# Altium PCB Tran_RF1.PcbDoc
Units mm, origin at the board's own origin, x right, y up, seen from the top; angles counter-clockwise.
Board outline 127 x 101.6 mm, 2 copper layers (Top Layer, Bottom Layer); 61 components, 22 nets, 261 pads, 14 vias.
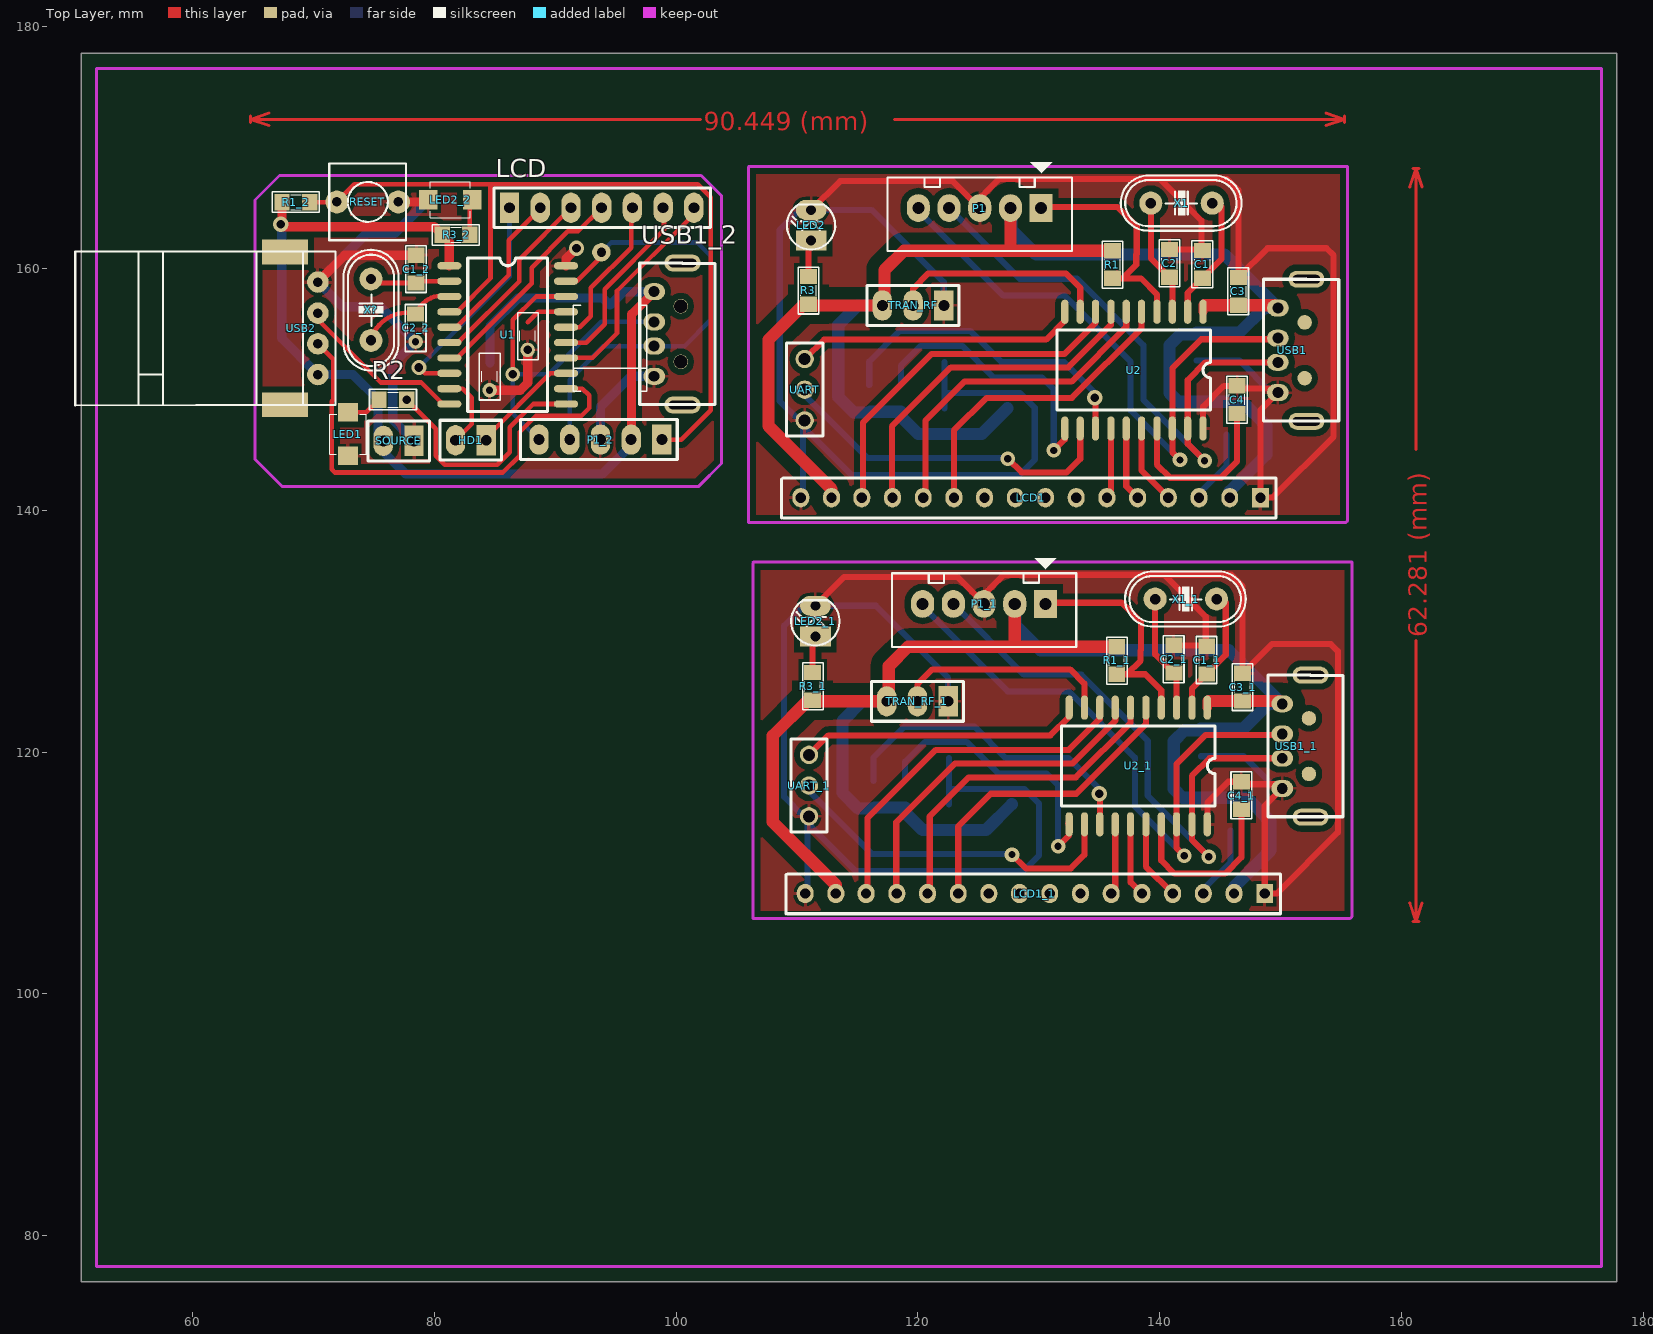
[diagram p0: Top Layer view]
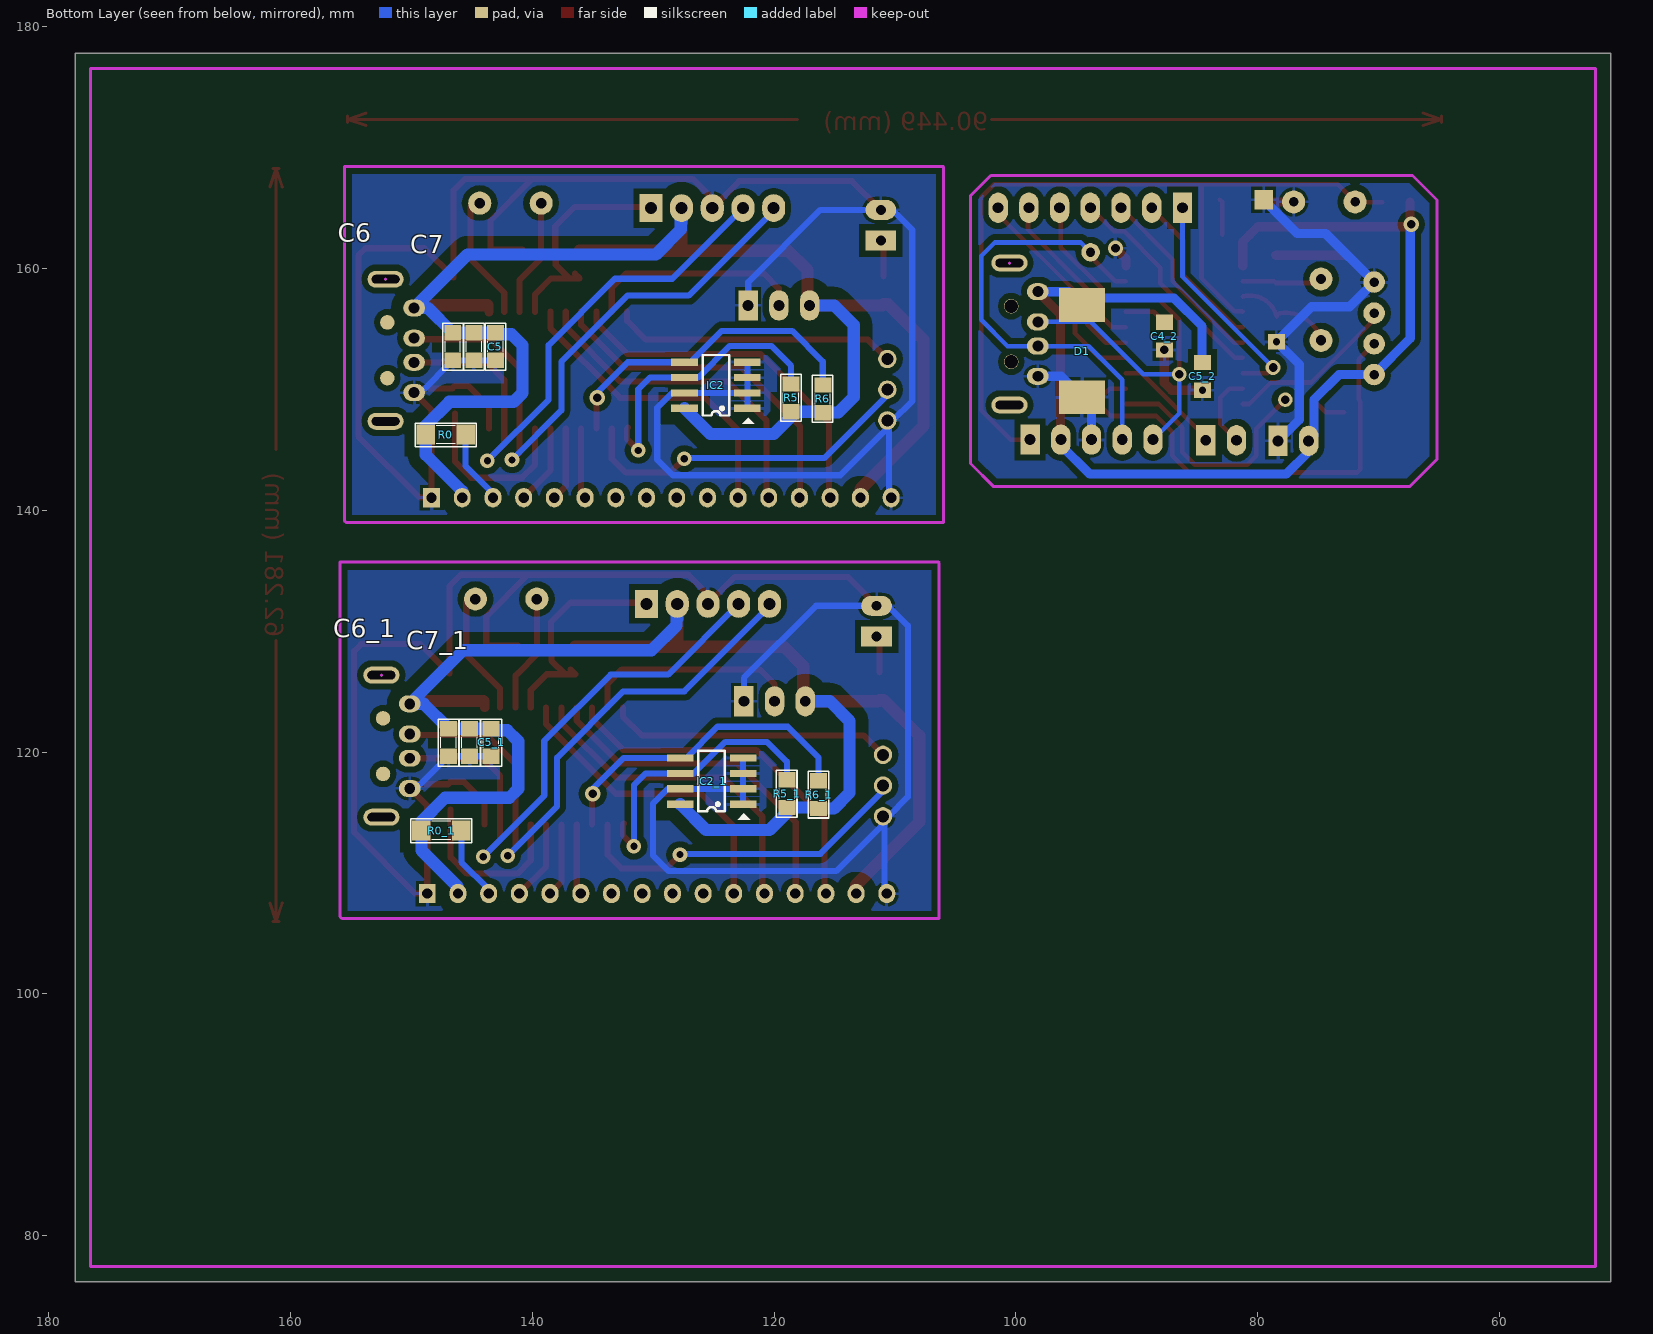
[diagram p1: Bottom Layer view, seen from below]
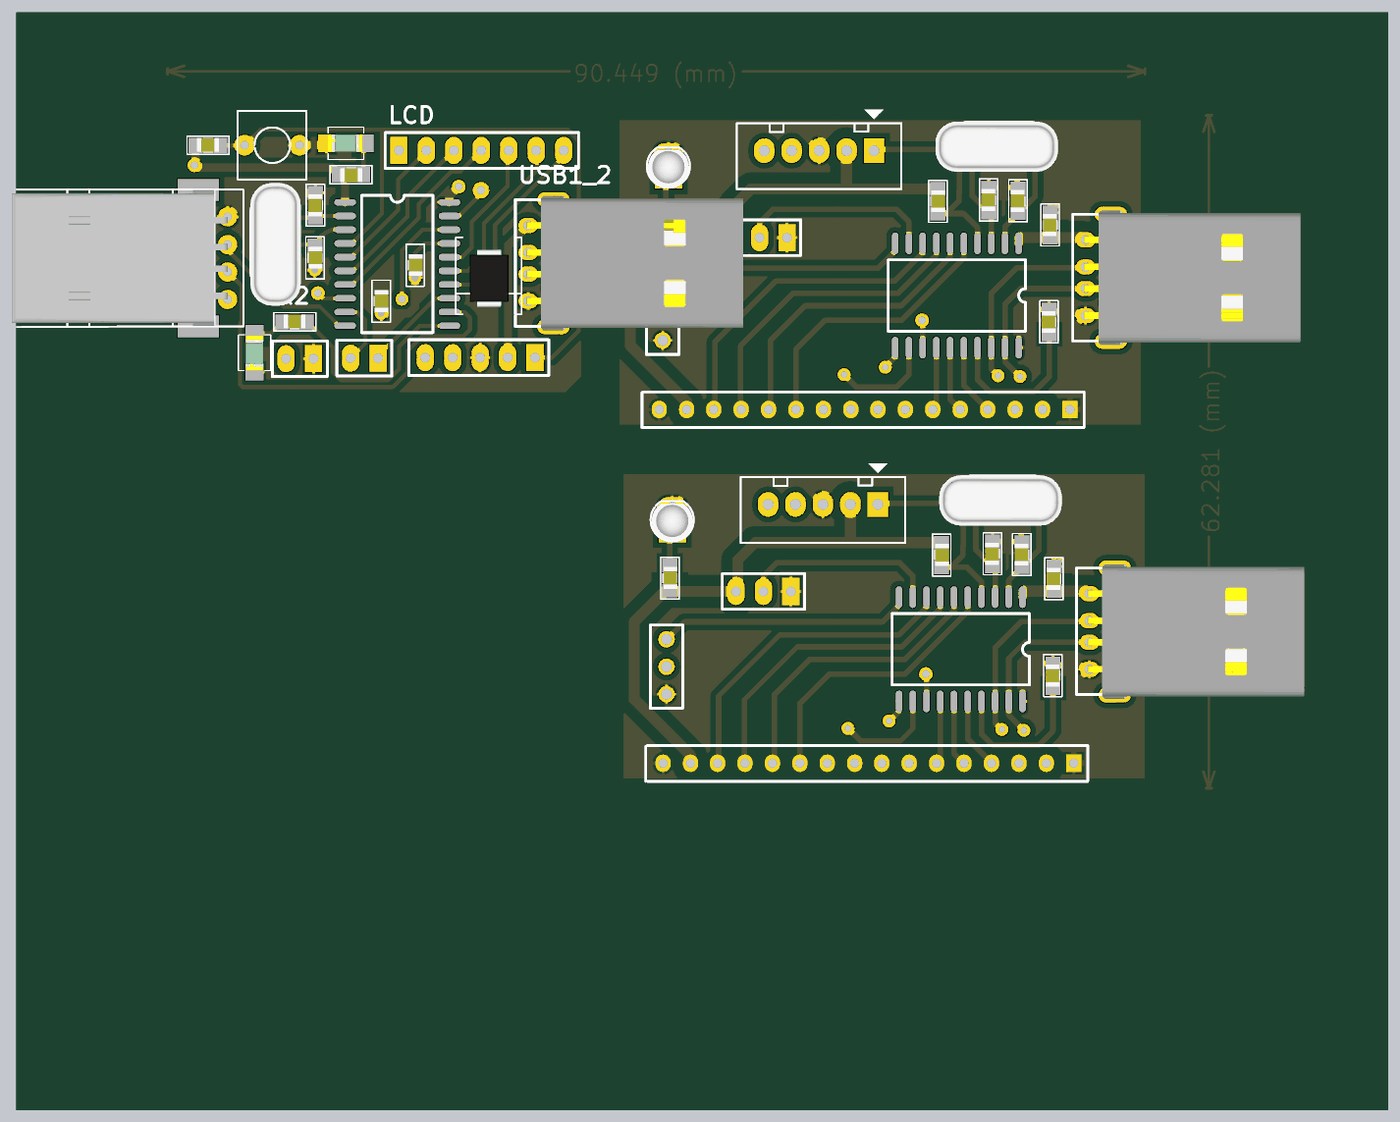
[diagram p2: 3D render of the assembled board from above, using the file's embedded part models]
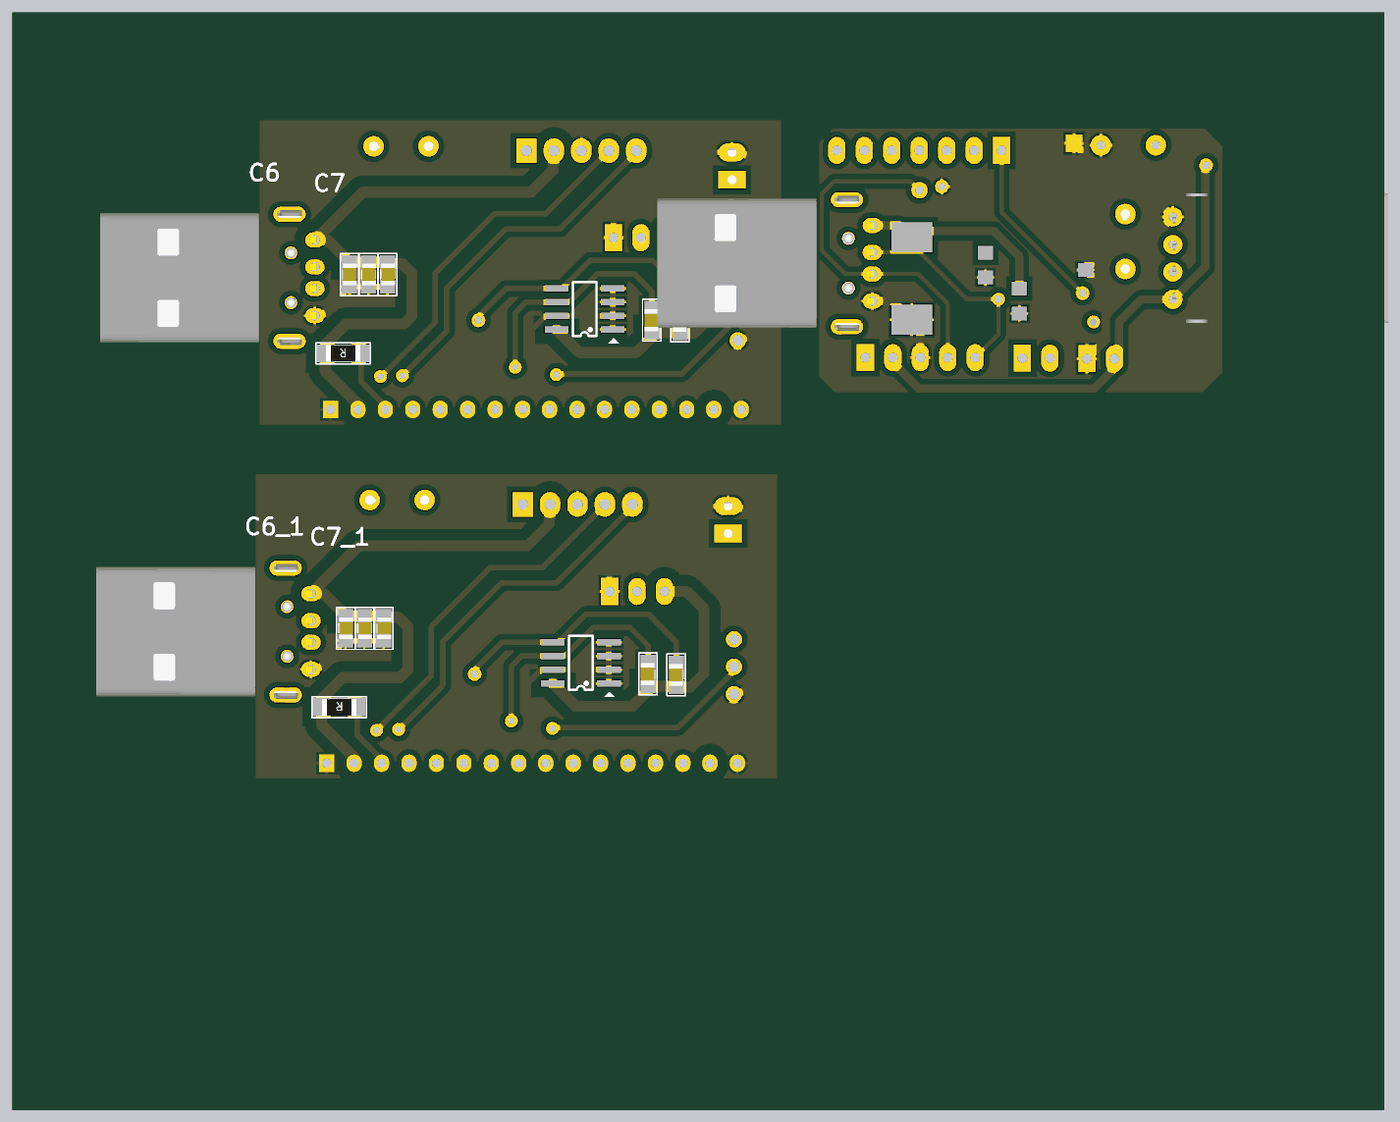
[diagram p3: 3D render of the assembled board from below, using the file's embedded part models]

## Layer stack, top to bottom
Top Layer: signal copper 0.0356
Dielectric: core 0.32, FR-4, Dk 4.8
Bottom Layer: signal copper 0.0356

## Board outline
50.8,76.2 177.8,76.2 177.8,177.8 50.8,177.8

## Design rules (kind name [scope] priority, off if disabled: settings)
Clearance VCC [InNet('VCC')] p1: gap=1.016
Clearance [All] p2: gap=0.508
PolygonConnect [All] p1: connectstyle=Relief reliefconductorwidth=0.254 reliefentries=4 polygonreliefangle="90 Angle" airgapwidth=0.254
RoutingVias [All] p1: holewidth=0.635 width=1.016 viastyle="Through Hole" minholewidth=0.711 minwidth=1.27 maxholewidth=0.711 maxwidth=1.27
SolderMaskExpansion [All] p1: expansion=0.102
Width VCC_1 [InNet('VCC')] p1: maxlimit=1.016 minlimit=1.016 preferedwidth=1.016
Width [All] p2: maxlimit=0.508 minlimit=0.508 preferedwidth=0.508
28 further rules are at their usual default settings.

## Classes and differential pairs
component class Tran_RF: C1 C2 C3 C4 C5 C6 C7 IC2 LCD1 LED2 P1 R0 R1 R3 R5 R6 TRAN_RF U2 UART USB1 X1

## Components (designator, comment, footprint, x,y, rotation, side; value= is the part's Value field where it differs from the comment)
C1 "33pF" SM-0805#1 143.535,160.35 r270 top
C1_1 "33pF" SM-0805#1 143.891,127.61 r270 top (schematic designator C1)
C1_2 "33pF" SM-0805#1 78.511,159.944 r270 top (schematic designator C1)
C2 "33pF" SM-0805#1 140.818,160.426 r270 top
C2_1 "33pF" SM-0805#1 141.173,127.686 r270 top (schematic designator C2)
C2_2 "33pF" SM-0805#2 78.461,155.092 r90 top (schematic designator C2)
C3 "103" SM-0805#1 146.507,158.115 r270 top
C3_1 "103" SM-0805#1 146.863,125.374 r270 top (schematic designator C3)
C4 "103" SM-0805#1 146.406,149.149 r270 top
C4_1 "103" SM-0805#1 146.761,116.408 r270 top (schematic designator C4)
C4_2 "103" SM-0805#3 87.732,154.407 r90 top (schematic designator C4)
C5 "103" SM-0805#1 143.053,153.543 r90 bottom
C5_1 "103" SM-0805#1 143.408,120.802 r90 bottom (schematic designator C5)
C5_2 "103" SM-0805#3 84.582,151.079 r90 top (schematic designator C5)
C6 "103" SM-0805#1 144.831,153.543 r90 bottom
C6_1 "103" SM-0805#1 145.186,120.802 r90 bottom (schematic designator C6)
C7 "103" SM-0805#1 146.583,153.543 r90 bottom
C7_1 "103" SM-0805#1 146.939,120.802 r90 bottom (schematic designator C7)
D1 "1N4007" SM-DIODE 94.539,153.162 r90 top
HD1 "Header 2" HEADER1x2 84.303,145.796 r180 top
IC2 "24Cxx" SO-G8 124.816,150.343 r90 bottom
IC2_1 "24Cxx" SO-G8 125.171,117.602 r90 bottom (schematic designator IC2)
LCD "Header 7H" HEADER1x7 86.233,165.024 r0 top
LCD1 "LCD16x2A" LCD 148.336,141.046 r180 top
LCD1_1 "LCD16x2A" LCD 148.692,108.306 r180 top (schematic designator LCD1)
LED1 "LED" SM-LED-Red#1 72.873,148.107 r270 top
LED2 "LED" LED-3 111.176,162.306 r90 top
LED2_1 "LED" LED-3 111.531,129.565 r90 top (schematic designator LED2)
LED2_2 "LED" SM-LED-Red#2 83.134,165.684 r180 top (schematic designator LED2)
P1 "MACH NAP" CON5 130.2,164.998 r180 top
P1_1 "MACH NAP" CON5 130.556,132.258 r180 top (schematic designator P1)
P1_2 "MACH NAP" HEADER1x5 98.831,145.847 r180 top (schematic designator P1)
R0 "1k" SM-1206 147.168,146.253 r0 bottom
R0_1 "1k" SM-1206 147.523,113.513 r0 bottom (schematic designator R0)
R1 "10K" SM-0805#1 136.093,160.325 r90 top
R1_1 "10K" SM-0805#1 136.449,127.584 r90 top (schematic designator R1)
R1_2 "10K" SM-0805#1 68.555,165.481 r180 top (schematic designator R1)
R2 "1k" SM-0805#1 76.581,149.149 r180 top
R3 "220" SM-0805#1 110.947,158.191 r90 top
R3_1 "220" SM-0805#1 111.303,125.451 r90 top (schematic designator R3)
R3_2 "1k" SM-0805#1 81.813,162.789 r0 top (schematic designator R3)
R5 "1k" SM-0805#1 118.593,149.301 r270 bottom
R5_1 "1k" SM-0805#1 118.948,116.561 r270 bottom (schematic designator R5)
R6 "1k" SM-0805#1 115.976,149.225 r270 bottom
R6_1 "1k" SM-0805#1 116.332,116.484 r270 bottom (schematic designator R6)
RESET "SW" SW2 77.038,165.506 r180 top
SOURCE "Header 2" HEADER1x2 78.334,145.745 r180 top
TRAN_RF "JP3" HEADER1x3 122.149,156.947 r180 top
TRAN_RF_1 "JP3" HEADER1x3 122.504,124.206 r180 top (schematic designator TRAN_RF)
U1 "PIC18F14K50-I/P" SOP-20 81.255,160.223 r0 top
U2 "PIC18F14K50-I/P" SOP-20 143.586,156.422 r270 top
U2_1 "PIC18F14K50-I/P" SOP-20 143.942,123.682 r270 top (schematic designator U2)
UART "JP3" CON3 110.642,149.936 r90 top
UART_1 "JP3" CON3 110.998,117.196 r90 top (schematic designator UART)
USB1 "USB-S" USB-A-RA#1 149.86,153.238 r90 top
USB1_1 "USB-S" USB-A-RA#1 150.216,120.498 r90 top (schematic designator USB1)
USB1_2 "USB-S" USB-A-RA#2 98.273,154.584 r90 top (schematic designator USB1)
USB2 "USB-S" USB-A 70.383,151.232 r90 top
X1 "8Mhz" XT2 141.808,165.405 r0 top
X1_1 "8Mhz" XT2 142.164,132.664 r0 top (schematic designator X1)
X? "4Mhz" XT2 74.778,156.591 r90 top

## Footprints (in the part's own frame and the unit in brackets; to place one, negate y for a bottom-side part, rotate by r counter-clockwise, add the part's x,y. Pads: shape width x height; smd on the part's side, far side on the other; paste and mask are expansions set on the pad)
CON3 [mm] "3-Pin Connector; pitch 2.54mm"
  round 1.524 hole 1: 1(-2.5,0) 2(0.04,0) 3(2.58,0)
  silkscreen extent -3.8,-1.5 3.9,1.5
CON5 [mm] "CON5"
  rect 1.905x2.286 hole 1: 1(0,0)
  oval 1.905x2.286 hole 1: 2(2.54,0) 3(5.08,0) 4(7.62,0) 5(10.16,0)
  silkscreen extent -2.54,-3.8 12.7,3.56, body extent -2.63,-2.7 12.83,3.7, height 7
HEADER1x2 [mm]
  rect 1.6x2.5 hole 0.9: 1(0,0)
  oval 1.6x2.5 hole 0.9: 2(2.54,0)
  silkscreen extent -1.27,-1.65 3.81,1.65
HEADER1x3 [mm]
  rect 1.6x2.5 hole 0.9: 1(0,0)
  oval 1.6x2.5 hole 0.9: 2(2.54,0) 3(5.08,0)
  silkscreen extent -1.27,-1.65 6.35,1.65
HEADER1x5 [mm]
  rect 1.6x2.5 hole 0.9: 1(0,0)
  oval 1.6x2.5 hole 0.9: 2(2.54,0) 3(5.08,0) 4(7.62,0) 5(10.16,0)
  silkscreen extent -1.27,-1.65 11.68,1.65
HEADER1x7 [mm]
  rect 1.6x2.5 hole 0.9: 1(0,0)
  oval 1.6x2.5 hole 0.9: 2(2.54,0) 3(5.08,0) 4(7.62,0) 5(10.16,0) 6(12.7,0) 7(15.24,0)
  silkscreen extent -1.27,-1.65 16.63,1.65
LCD [mm]
  rect 1.4x1.6 hole 0.85 mask+0: 1(0,0)
  oval 1.4x1.6 hole 0.85 mask+0: 2(2.54,0) 3(5.08,0) 4(7.62,0) 5(10.16,0) 6(12.7,0) 7(15.24,0) 8(17.78,0) 9(20.28,0) 10(22.82,0) 11(25.351,0) 12(27.891,0) 13(30.431,0) 14(32.971,0) 15(35.471,0) 16(38.011,0)
  silkscreen extent -1.3,-1.63 39.61,1.67
LED-3 [mil] "LED 2 PIN, 3ly Only colour"
  rect 65x100 hole 32: 1(0,0)
  oval 65x100 hole 32: 2(100,0)
  silkscreen extent -29,-78 118,79, body extent -29,-75 109,75, height 256
SM-0805#1 [mil] "Compoment SMD 80x50mil"
  rect 50x55 smd: 1(-45,0) 2(45,0)
  silkscreen extent -77,-34 76,33, body extent -40,-27 40,23, height 24
SM-0805#2 [mil] "Compoment SMD 80x50mil"
  rect 50x55 smd far side: 1(-45,0)
  rect 50x55 smd: 2(45,0)
  silkscreen extent -77,-34 76,33, body extent -40,-27 40,23, height 24
SM-0805#3 [mil] "Compoment SMD 80x50mil"
  rect 50x55 smd far side: 1(-45,0) 2(45,0)
  silkscreen extent -77,-34 76,33, body extent -40,-27 40,23, height 24
SM-1206 [mil] "Compoment SMD 120x60mil"
  rect 60x65 smd: 1(-65,0) 2(65,0)
  silkscreen extent -99,-38 99,39, body extent -83,-35 83,36, height 25
SM-DIODE [mil] "Magnetic-Core Inductor with Winding Polarity Marking; 2 Leads"
  rect 110x150 smd far side: 1(-150,0) 2(150,0)
  silkscreen extent -130,-120 150,120, body extent -103,-73 105,69, height 96
SM-LED-Red#1 [mil]
  rect 60x65 smd: 1(0,0) 2(142,0)
  silkscreen extent 6,-59 136,59, body extent 10,-32 136,31, height 44
SM-LED-Red#2 [mil]
  rect 60x65 smd: 1(0,0)
  rect 60x65 all layers, no hole: 2(142,0)
  silkscreen extent 6,-59 136,59, body extent 10,-32 136,31, height 44
SO-G8 [mm] "Small Outline; 8 Leads; Body Width 3.9 mm; Pitch 1.27 mm"
  rect 0.6x2.2 smd: 1(-1.905,-2.6) 2(-0.635,-2.6) 3(0.635,-2.6) 4(1.905,-2.6) 5(1.905,2.6) 6(0.635,2.6) 7(-0.635,2.6) 8(-1.905,2.6)
  silkscreen extent -3.18,-3.17 2.5,1.1
SOP-20 [mm]
  oval 2x0.6 smd: 1(0,0) 2(0,-1.27) 3(0,-2.54) 4(0,-3.81) 5(0,-5.08) 6(0,-6.35) 7(0,-7.62) 8(0,-8.89) 9(0,-10.16) 10(0,-11.43) 11(9.652,-11.43) 12(9.652,-10.16) 13(9.652,-8.89) 14(9.652,-7.62) 15(9.652,-6.35) 16(9.652,-5.08) 17(9.652,-3.81) 18(9.652,-2.54) 19(9.652,-1.27) 20(9.652,0)
  silkscreen extent 1.52,-12.06 8.13,0.64
SW2 [mil] "SW button 2pin, 250x 250 mil"
  round 75 hole 31: 1(0,0) 2(200,0)
  silkscreen extent -25,-125 225,125
USB-A [mil]
  round 70 hole 31: 1(0,0) 2(100,0) 3(200,0) 4(301,0)
  rect 80x150 smd: 5(-98,107) 6(399,107)
  silkscreen extent -101,-57 401,790, body extent -97,0 399,784, height 177
USB-A-RA#1 [mm] "USB Type A"
  oval 1.4x1.8 hole 0.9: 1(3.5,0.08) 2(1,0.08) 3(-1,0.08) 4(-3.5,0.08)
  oval 1.4x3 hole 0.7 slot 2.3 at 90 deg: HOLE(-5.875,-2.27) HOLE(5.875,-2.27)
  round 1.2 all layers, no hole: HOLE(-2.3,-2.13) HOLE(2.3,-2.13)
  Keep-Out Layer lines w0.254: 5.842,-2.27 5.875,-2.27
  silkscreen extent -5.84,-4.95 5.87,1.27, body extent -6.25,-19.8 6.25,0.23, height 2.18
USB-A-RA#2 [mm] "USB Type A"
  oval 1.4x1.8 hole 0.9: 1(3.5,0.08) 2(1,0.08) 3(-1,0.08) 4(-3.5,0.08)
  oval 1.4x3 hole 0.7 slot 2.3 at 90 deg: HOLE(-5.875,-2.27) HOLE(5.875,-2.27)
  round 1.2 hole 1.1: HOLE(-2.3,-2.13) HOLE(2.3,-2.13)
  Keep-Out Layer lines w0.254: 5.842,-2.27 5.875,-2.27
  silkscreen extent -5.84,-4.95 5.87,1.27, body extent -6.25,-19.8 6.25,0.23, height 2.18
XT2 [mil] "Footpin for Crystal 2 pin"
  round 75 hole 34: 1(-100,0) 2(100,0)
  silkscreen extent -198,-90 195,90, body extent -233,-93 213,90, height 138

## Part data
C1 C1_1 C1_2 C2 C2_1 C2_2 C3 C3_1 C4 C4_1 C4_2 C5 C5_1 C5_2 C6 C6_1 C7 C7_1: library part CM, "Cap SMD"
D1: library part D1A, "Diode 1A"
HD1 SOURCE: library part Hed2, "Header 2 (Green)"
IC2 IC2_1: "Standard 2-Wire Bus Interface Serial EEPROM"
LCD: "Header, 7-Pin, Right Angle"
LCD1 LCD1_1: library part LCD16x2, "LCD dipslay 16 char, 2 line"
LED1 LED2 LED2_1 LED2_2: "LED Single colour Green and Red"
P1 P1_1 P1_2: library part "Header 5H", "Header, 5-Pin, Right Angle"
R0 R0_1 R1 R1_1 R1_2 R2 R3 R3_1 R3_2 R5 R5_1 R6 R6_1: library part R, "Resistor 1/4W"
RESET: library part SW2, "Switch button 2 pin"
TRAN_RF TRAN_RF_1 UART UART_1: library part Con3, "Connector 3"
U1 U2 U2_1: "USB Flash Microcontroller with nanoWatt XLP Technology, 20-pin PDIP, Industrial Temperature"
USB1 USB1_1 USB1_2 USB2: library part USB_S, "USB connector"
X1 X1_1 X?: library part XT2, "Crystal For all Crystal 2pin."

## Free pads (board coordinates)
  round 1.2 hole 0.6: 1(78.461,153.949) 6(84.582,149.936)
  round 1.2 hole 0.7: 2(87.732,153.264) 4(77.724,149.149)
  round 1.524 hole 0.762: 3(93.828,161.341)

## Via types
v1: diameter 1.2, hole 0.6, Top Layer to Bottom Layer, 8 vias
v2: diameter 1.27, hole 0.711, Top Layer to Bottom Layer, 4 vias
v3: diameter 1.2, hole 0.7, Top Layer to Bottom Layer, 1 vias
v4: diameter 1.27, hole 0.7, Top Layer to Bottom Layer, 1 vias

## Nets (pads, with @x,y where several pads share a name; then routed paths per layer and width w, separated by ;. In a path a pad name is that pad's centre, name@x,y a point inside that pad or via, vN(x,y) a via of type N, cw(c..) or ccw(c..) an arc to the next point about the centre after c; other vN are vias at no path point)
D4: LCD1.11 U2.5 | length 25.9
  Top Layer w0.508: LCD1.11 122.985,146.607 125.679,149.301 132.74,149.301 138.506,155.067 U2.5
D5: LCD1.12 U2.6 | length 27.5
  Top Layer w0.508: LCD1.12 120.625,141.226 120.625,147.422 123.85,150.647 132.715,150.647 137.236,155.169 U2.6
D6: LCD1.13 U2.7 | length 28.6
  Top Layer w0.508: LCD1.13 117.856,141.095 117.856,146.939 122.733,151.816 132.436,151.816 135.966,155.346 U2.7
D7: LCD1.14 U2.8 | length 29.8
  Top Layer w0.508: LCD1.14 115.468,141.15 115.468,147.269 121.133,152.933 132.131,152.933 134.696,155.499 U2.8
D+/PGD: P1.4 U2.19 USB1.3 | length 47.8
  Top Layer w0.508: v1(143.713,144.094) 142.316,145.491 U2.19 142.316,150.774 143.78,152.238 USB1.3
  Bottom Layer w0.508: P1.4 128.422,159.156 133.172,159.156 138.659,153.67 138.659,149.149 v1(143.713,144.094)
D-/PGC: P1.5 U2.18 USB1.2 | length 50.4
  Top Layer w0.508: v1(141.681,144.17) 141.046,144.805 U2.18 141.046,151.765 143.434,154.152 149.694,154.152 USB1.2
  Bottom Layer w0.508: P1.5 120.04,164.795 127.076,157.759 132.131,157.759 137.592,152.298 137.592,148.26 v1(141.681,144.17)
EN: LCD1.6 U2.14 | length 5.4
  Top Layer w0.508: LCD1.6@135.966,141.376 U2.14
GND: C1.1 C2.1 C3.1 C4.1 C5.1 C6.1 C7.1 IC2.1 IC2.2 IC2.3 IC2.4 IC2.7 LCD1.1 LCD1.16 LED2.2 P1.3 TRAN_RF.1 U2.20 UART.1 USB1.4 | length 194.1
  Top Layer w0.508: LED2.2 113.563,167.234 122.885,167.234 P1.3 125.12,165.792 126.74,167.411 140.005,167.411 ; C2.1 C1.1@143.459,161.569 ; C1.1 C1.1@143.459,161.569 ; U2.20 143.586,148.565 145.313,150.292 C4.1 146.609,150.089 149.43,150.089 USB1.4 148.336,148.294 LCD1.1 149.327,141.046 154.381,146.101 154.381,161.087 153.797,161.671 148.92,161.671 C3.1 146.507,166.472 145.567,167.411 140.005,167.411 ; 140.005,167.411 143.459,163.957 C1.1@143.459,161.569
  Bottom Layer w0.508: LCD1.16 110.515,141.237 110.515,146.75 UART.1@110.642,146.877 ; IC2.1 IC2.2 ; IC2.4 IC2.3 IC2.2 ; TRAN_RF.1@122.216,156.88 TRAN_RF.1 122.149,158.877 116.18,164.846 LED2.2 110.236,164.846 108.585,163.195 108.585,149.036 110.185,147.436 UART.1 UART.1@110.642,146.877 ; C5.1 C6.1 C7.1 149.245,149.738 USB1.4 ; UART.1@110.642,146.877 110.642,146.787 114.529,142.9 128.372,142.9 129.667,144.196 129.667,148.488 128.448,149.708 IC2.7 IC2.2
MCLR: P1.1 R1.1 U2.4 | length 19.6
  Top Layer w0.508: P1.1 130.302,165.1 136.5,165.1 138.102,163.497 138.102,161.191 138.062,161.15 138.062,160.307 136.937,159.182 ; R1.1@136.474,159.563 R1.1 136.937,159.182 ; U2.4 139.776,157.861 138.455,159.182 136.937,159.182
NetC4_2: C4.2 U2.17 | length 14.6
  Top Layer w0.508: U2.17 139.776,143.789 140.868,142.697 145.059,142.697 146.406,144.043 C4.2
NetLED2_1: LED2.1 R3.2 | length 3.1
  Top Layer w0.508: R3.2 110.947,162.077 LED2.1
OSC1: C1.2 U2.2 X1.2 | length 10.7
  Top Layer w0.508: U2.2 142.316,157.988 C1.2 145.11,160.782 145.11,165.125 144.831,165.405 X1.2
OSC2: C2.2 U2.3 X1.1 | length 9.7
  Top Layer w0.508: X1.1 139.268,160.833 C2.2 141.046,159.055 U2.3
RS: LCD1.4 U2.16 | length 6.6
  Top Layer w0.508: U2.16 138.506,143.281 140.716,141.072 LCD1.4
RW: LCD1.5 U2.15 | length 6.1
  Top Layer w0.508: U2.15 137.236,141.986 LCD1.5
RX: U2.12 UART.2 | length 28.7
  Top Layer w0.508: v1(127.432,144.272) 128.575,143.129 132.309,143.129 133.426,144.247 U2.12
  Bottom Layer w0.508: UART.2@110.414,149.748 115.831,144.33 127.374,144.33 v1(127.432,144.272)
SCL: IC2.6 R5.1 U2.11 | length 23.7
  Top Layer w0.508: v1(131.242,144.958) 132.156,145.872 U2.11 U2.11@132.089,146.837
  Bottom Layer w0.508: R5.1 118.593,151.943 120.244,153.594 123.673,153.594 126.289,150.978 IC2.6 130.277,150.978 131.242,150.012 v1(131.242,144.958)
SDA: IC2.5 R6.1 U2.13 | length 26.7
  Top Layer w0.508: v2(134.645,149.301) 134.696,149.25 U2.13
  Bottom Layer w0.508: R6.1 115.976,152.298 118.516,154.838 124.333,154.838 126.924,152.248 IC2.5 132.105,152.248 134.645,149.708 v2(134.645,149.301)
TRAN_RF: TRAN_RF.2 U2.9 | length 18.2
  Top Layer w0.508: TRAN_RF.2 119.609,158.344 120.853,159.588 132.232,159.588 133.426,158.394 U2.9
TX: U2.10 UART.3 | length 23.6
  Top Layer w0.508: UART.3 112.253,154.127 130.607,154.127 132.156,155.677 U2.10
VCC: C3.2 C5.2 C6.2 C7.2 IC2.8 LCD1.2 LCD1.15 P1.2 R0.2 R1.2 R3.1 R5.2 R6.2 TRAN_RF.3 U2.1 USB1.1 | length 143.7
  Top Layer w0.762: U2.1 143.586,156.845 U2.1@143.713,156.972
  Top Layer w1.016: LCD1.15 112.865,141.751 107.645,146.971 107.645,154.102 110.592,157.048 R3.1 111.049,156.947 TRAN_RF.3 117.246,157.124 117.246,159.868 118.847,161.468 127.66,161.468 ; P1.2 127.66,161.468 ; R1.2 127.66,161.468 ; U2.1@143.713,156.972 C3.2 149.546,156.972 USB1.1
  Bottom Layer w1.016: TRAN_RF.3 115.037,156.947 113.411,155.321 113.411,149.377 114.706,148.082 R6.2 116.053,148.158 R5.2 118.593,147.752 120.04,146.304 125.282,146.304 IC2.8 ; 127.66,163.779 P1.2 127.724,164.935 127.724,163.224 129.785,161.163 145.355,161.163 USB1.1 148.636,156.738 C7.2 C6.2 C5.2 142.926,154.559 141.723,154.559 140.818,153.654 140.818,149.708 141.554,148.971 146.863,148.971 148.819,147.015 R0.2 148.819,144.602 145.796,141.58 LCD1.2
VSS: LCD1.3 R0.1 | length 6.1
  Bottom Layer w0.508: LCD1.3 143.256,141.392 145.517,143.653 R0.1
pads on no net: C1_1.1 C1_1.2 C1_2.1 C1_2.2 C2_1.1 C2_1.2 C2_2.1 C2_2.2 C3_1.1 C3_1.2 C4_1.1 C4_1.2 C4_2.1 C4_2.2 C5_1.1 C5_1.2 C5_2.1 C5_2.2 C6_1.1 C6_1.2 C7_1.1 C7_1.2 D1.1 D1.2 HD1.1 HD1.2 IC2_1.1 IC2_1.2 IC2_1.3 IC2_1.4 IC2_1.5 IC2_1.6 IC2_1.7 IC2_1.8 LCD1.7 LCD1.8 LCD1.9 LCD1.10 LCD1_1.1 LCD1_1.2 LCD1_1.3 LCD1_1.4 LCD1_1.5 LCD1_1.6 LCD1_1.7 LCD1_1.8 LCD1_1.9 LCD1_1.10 LCD1_1.11 LCD1_1.12 LCD1_1.13 LCD1_1.14 LCD1_1.15 LCD1_1.16 LCD.1 LCD.2 LCD.3 LCD.4 LCD.5 LCD.6 LCD.7 LED1.1 LED1.2 LED2_1.1 LED2_1.2 LED2_2.1 LED2_2.2 P1_1.1 P1_1.2 P1_1.3 P1_1.4 P1_1.5 P1_2.1 P1_2.2 P1_2.3 P1_2.4 P1_2.5 R0_1.1 R0_1.2 R1_1.1 R1_1.2 R1_2.1 R1_2.2 R2.1 R2.2 R3_1.1 R3_1.2 R3_2.1 R3_2.2 R5_1.1 R5_1.2 R6_1.1 R6_1.2 RESET.1 RESET.2 SOURCE.1 SOURCE.2 TRAN_RF_1.1 TRAN_RF_1.2 TRAN_RF_1.3 U1.1 U1.2 U1.3 U1.4 U1.5 U1.6 U1.7 U1.8 U1.9 U1.10 U1.11 U1.12 U1.13 U1.14 U1.15 U1.16 U1.17 U1.18 U1.19 U1.20 U2_1.1 U2_1.2 U2_1.3 U2_1.4 U2_1.5 U2_1.6 U2_1.7 U2_1.8 U2_1.9 U2_1.10 U2_1.11 U2_1.12 U2_1.13 U2_1.14 U2_1.15 U2_1.16 U2_1.17 U2_1.18 U2_1.19 U2_1.20 UART_1.1 UART_1.2 UART_1.3 USB1.HOLE USB1_1.1 USB1_1.2 USB1_1.3 USB1_1.4 USB1_1.HOLE USB1_2.1 USB1_2.2 USB1_2.3 USB1_2.4 USB1_2.HOLE USB2.1 USB2.2 USB2.3 USB2.4 USB2.5 USB2.6 X1_1.1 X1_1.2 X?.1 X?.2
copper on no net: | length 1403.1
  Top Layer w0.254: 64.821,172.085 64.821,172.593 ; 66.345,171.831 64.821,172.339 ; 66.345,172.847 64.821,172.339 ; 102.022,172.339 64.821,172.339 ; 118.069,172.339 155.27,172.339 ; 153.746,171.831 155.27,172.339 ; 153.746,172.847 155.27,172.339 ; 155.27,172.085 155.27,172.593 ; 160.68,107.518 161.188,105.994 ; 160.68,166.751 161.188,168.275 ; 160.934,105.994 161.442,105.994 ; 160.934,168.275 161.442,168.275 ; 161.188,129.238 161.188,105.994 ; 161.188,145.032 161.188,168.275 ; 161.696,107.518 161.188,105.994 ; 161.696,166.751 161.188,168.275
  Top Layer w0.381: 69.698,165.481 71.933,165.481 71.958,165.506 73.406,166.954 101.803,166.954 102.87,165.887 102.87,148.285 100.432,145.847 98.831,145.847 ; 70.383,153.772 71.666,152.489 71.666,149.149 71.526,149.009 71.526,143.383 71.78,143.129 85.674,143.129 87.071,144.526 87.071,146.482 88.392,147.803 92.151,147.803 92.812,148.463 92.812,149.504 92.253,150.063 90.907,150.063 ; 70.383,156.312 70.383,155.778 75.59,150.571 78.918,150.571 80.696,148.793 81.255,148.793 ; 72.873,148.107 74.397,148.107 75.438,149.149 ; 74.778,154.051 cw(c77.711,153.302) 78.461,156.235 ; 74.778,159.131 75.108,158.801 78.511,158.801 ; 77.724,149.149 80.137,146.736 80.137,144.501 80.874,143.764 85.217,143.764 86.258,144.805 86.258,146.863 88.189,148.793 90.907,148.793 ; 78.435,156.032 cw(c80.67,155.448) 81.255,157.683 ; 78.664,158.953 81.255,158.953 ; v2(78.74,151.816) 79.223,151.333 81.255,151.333 ; 81.255,150.063 82.372,150.063 83.109,149.327 83.109,147.142 81.763,145.796 ; 81.255,152.603 81.902,152.603 88.062,158.763 88.062,160.071 91.059,163.068 91.897,163.068 93.853,165.024 ; 81.255,153.873 81.966,153.873 87.02,158.928 87.02,160.731 91.313,165.024 ; 81.255,155.143 81.839,155.143 86.157,159.461 86.157,162.341 88.773,164.957 88.773,165.024 ; 81.255,156.413 81.305,156.464 81.94,156.464 84.658,159.182 84.658,166.814 84.607,166.865 ; 82.956,162.789 82.956,165.506 83.134,165.684 ; 84.303,145.796 84.303,146.025 89.611,151.333 90.907,151.333 ; v3(86.512,151.257) 86.512,155.753 88.443,157.683 90.907,157.683 ; 87.732,155.55 88.595,156.413 90.907,156.413 ; 88.671,145.847 88.671,146.482 ; 90.907,152.603 93.091,152.603 95.123,154.635 95.123,158.14 100.914,163.932 ; 90.907,153.873 92.583,153.873 94.107,155.397 94.107,158.293 99.009,163.195 99.009,163.932 ; 90.907,155.143 92.05,155.143 92.964,156.058 92.964,158.394 96.291,161.722 96.291,163.932 ; 90.907,158.953 91.796,158.953 93.828,160.985 93.828,161.341
  Top Layer w0.508: 110.998,119.776 112.609,121.387 130.962,121.387 132.512,122.936 132.512,123.682 ; 111.303,126.594 111.303,129.337 111.531,129.565 ; 111.531,132.105 113.919,134.493 123.241,134.493 125.476,132.258 125.476,133.051 127.095,134.671 140.36,134.671 ; 115.721,108.306 115.824,108.409 115.824,114.529 121.488,120.193 132.486,120.193 135.052,122.758 135.052,123.682 ; 118.261,108.306 118.212,108.355 118.212,114.198 123.088,119.075 132.791,119.075 136.322,122.606 136.322,123.682 ; 119.964,124.206 119.964,125.603 121.209,126.848 132.588,126.848 133.782,125.654 133.782,123.682 ; 120.801,108.306 120.98,108.485 120.98,114.681 124.206,117.907 133.071,117.907 137.592,122.428 137.592,123.682 ; 123.341,108.306 123.341,113.866 126.035,116.561 133.096,116.561 138.862,122.326 138.862,123.682 ; v1(127.787,111.531) 128.93,110.388 132.664,110.388 133.782,111.506 133.782,114.03 ; 130.556,132.258 130.658,132.359 136.855,132.359 138.458,130.757 138.458,128.45 138.417,128.41 138.417,127.566 137.292,126.441 ; v1(131.597,112.217) 132.512,113.132 132.512,114.03 132.445,114.097 ; v2(135.001,116.561) 135.052,116.51 135.052,114.03 ; 136.322,108.636 136.322,114.03 ; 136.83,126.822 136.449,126.441 137.292,126.441 ; 137.592,114.03 137.592,109.245 138.532,108.306 ; 138.862,114.03 138.862,110.541 141.072,108.331 141.072,108.306 ; 139.624,132.664 139.624,128.092 141.173,126.543 141.402,126.314 141.402,123.682 ; 140.132,114.03 140.132,111.049 141.224,109.957 145.415,109.957 146.761,111.303 146.761,115.265 ; 140.132,123.682 140.132,125.12 138.811,126.441 137.292,126.441 ; 141.173,128.829 143.815,128.829 ; v1(142.037,111.43) 141.402,112.065 141.402,114.03 141.402,119.024 143.789,121.412 150.05,121.412 150.136,121.498 ; 142.672,123.682 142.672,125.247 143.891,126.467 145.466,128.041 145.466,132.385 145.186,132.664 144.704,132.664 ; 143.891,128.753 143.815,128.829 ; 143.942,114.03 143.942,115.824 145.669,117.551 146.761,117.551 146.964,117.348 149.785,117.348 150.136,116.998 148.692,115.554 148.692,108.306 149.682,108.306 154.737,113.36 154.737,128.346 154.153,128.93 149.276,128.93 146.863,126.517 146.863,133.731 145.923,134.671 140.36,134.671 ; v1(144.069,111.354) 142.672,112.751 142.672,114.03 142.672,118.034 144.136,119.498 150.136,119.498 ; 140.36,134.671 143.815,131.216 143.815,128.829
  Top Layer w0.762: v4(67.31,163.652) 67.513,163.449 80.01,163.449 80.67,162.789 81.255,162.204 81.255,160.223 ; v4@67.412,163.754 67.412,165.481 ; 70.383,158.877 72.593,161.087 78.511,161.087 ; 77.038,165.506 79.35,165.506 79.527,165.684 ; 78.334,145.059 78.334,145.745 ; 84.582,149.936 87.119,149.936 87.732,150.549 87.732,153.264 87.595,153.127 ; 90.907,160.223 90.907,160.807 v2(91.77,161.671) ; 96.291,145.847 96.329,145.885 96.329,156.221 98.193,158.084 ; 143.942,123.682 143.942,124.104 144.069,124.231
  Top Layer w1.016: 113.221,108.306 113.221,109.011 108.001,114.231 108.001,121.361 110.947,124.308 111.303,124.308 111.404,124.206 117.424,124.206 117.602,124.384 117.602,127.127 119.202,128.727 128.016,128.727 ; 128.016,132.258 128.016,128.727 ; 136.449,128.727 128.016,128.727 ; 144.069,124.231 146.863,124.231 149.902,124.231 150.136,123.998
  Bottom Layer w0.381: v2(78.74,151.816) 86.233,159.309 86.233,165.024 ; 88.671,145.847 86.512,148.006 v3(86.512,151.257) 89.484,151.257 93.812,155.584 98.193,155.584 ; 91.211,145.847 91.211,150.8 93.996,153.584 98.193,153.584 100.702,153.584 102.87,155.753 102.87,161.036 101.752,162.154 94.64,162.154 93.828,161.341
  Bottom Layer w0.508: 110.681,108.306 110.871,108.496 110.871,114.01 110.998,114.137 ; 110.769,117.007 116.187,111.589 127.729,111.589 v1(127.787,111.531) ; 116.332,117.627 116.332,119.558 118.872,122.098 124.689,122.098 127.279,119.507 127.771,119.507 132.461,119.507 135.001,116.967 v2(135.001,116.561) ; 118.948,117.704 118.948,119.202 120.599,120.853 124.028,120.853 126.644,118.237 127.771,118.237 130.632,118.237 131.597,117.272 v1(131.597,112.217) ; 120.396,132.258 120.396,132.055 127.432,125.019 132.486,125.019 137.947,119.558 137.947,115.519 v1(142.037,111.43) ; 122.571,115.697 122.571,116.967 ; 122.571,119.507 122.571,118.237 122.571,116.967 ; 122.571,124.139 122.504,124.206 122.504,126.136 116.535,132.105 111.531,132.105 110.592,132.105 108.941,130.454 108.941,116.296 110.541,114.696 110.998,114.696 110.998,114.137 ; 122.936,132.258 128.778,126.416 133.528,126.416 139.014,120.929 139.014,116.408 v1(144.069,111.354) ; 143.408,119.659 145.186,119.659 146.939,119.659 149.601,116.998 150.136,116.998 ; 143.612,108.306 143.612,108.652 145.872,110.912 145.872,113.513 ; 110.998,114.137 110.998,114.046 114.884,110.16 128.727,110.16 130.023,111.455 130.023,115.748 128.803,116.967 127.771,116.967 122.571,116.967
  Bottom Layer w0.762: v4(67.31,163.652) 67.386,163.576 67.386,154.229 70.383,151.232 73.279,151.232 75.362,149.149 75.362,146.177 75.794,145.745 75.794,144.856 77.648,143.002 93.904,143.002 96.291,145.39 96.291,145.847 ; 78.334,145.745 76.581,147.498 76.581,152.07 78.461,153.949 75.565,156.845 72.415,156.845 70.383,158.877 74.397,162.89 76.733,162.89 79.527,165.684 ; 84.607,152.197 84.607,155.219 86.944,157.556 93.955,157.556 94.539,156.972 95.651,158.084 98.193,158.084 ; 94.082,146.177 93.751,145.847 93.751,148.565 94.539,149.352 96.271,151.084 98.193,151.084
  Bottom Layer w1.016: 117.424,124.206 115.392,124.206 113.767,122.58 113.767,116.637 115.062,115.341 116.332,115.341 116.408,115.418 118.948,115.418 118.948,115.011 120.396,113.563 125.638,113.563 127.771,115.697 ; 128.016,131.039 128.016,132.258 128.079,132.194 128.079,130.484 130.141,128.422 145.711,128.422 150.136,123.998 148.991,123.998 146.939,121.945 145.186,121.945 143.408,121.945 143.281,121.818 142.079,121.818 141.173,120.913 141.173,116.967 141.91,116.23 147.218,116.23 149.174,114.275 149.174,113.513 149.174,111.862 146.152,108.839 146.152,108.306

## Polygon pours and split planes (outlines as drawn)
no net on Top Layer "Top Layer-No Net" (solid, remove dead copper, pour order 7): 100.965,141.732 100.584,142.113 67.285,142.113 67.285,142.392 65.227,144.45 65.176,144.501 65.176,165.659 67.208,167.691 102.083,167.691 103.759,166.014 103.759,143.866 101.879,141.986
no net on Top Layer "Top Layer-No Net" (solid, remove dead copper, pour order 9): 106.35,135.661 106.35,106.477 106.578,106.248 155.753,106.248 155.753,135.56 155.905,135.712 155.854,135.661 106.35,135.661
GND on Top Layer "Top Layer-No Net" (solid, remove dead copper, pour order 10): 105.994,168.402 105.994,139.217 106.223,138.989 155.397,138.989 155.397,168.3 155.55,168.453 155.499,168.402 105.994,168.402
no net on Bottom Layer "Top Layer-No Net" (solid, remove dead copper, pour order 8): 101.879,141.986 101.752,142.113 67.285,142.113 65.176,144.221 65.176,165.659 65.303,165.659 67.005,167.361 67.335,167.691 102.083,167.691 103.759,166.014 103.759,143.866 101.879,141.986
no net on Bottom Layer "Top Layer-No Net" (solid, remove dead copper, pour order 11): 106.35,135.661 155.854,135.661 155.905,135.712 155.905,106.401 106.502,106.401 106.35,106.248 106.401,106.299 106.401,135.712
GND on Bottom Layer "Top Layer-No Net" (solid, remove dead copper, pour order 12): 105.994,168.402 155.499,168.402 155.55,168.453 155.55,139.141 106.147,139.141 105.994,138.989 106.045,139.04 106.045,168.453

## Keep-outs
Keep-Out Layer:
  lines w0.254: 52.07,77.47 52.07,176.53 176.53,176.53 176.53,77.47 52.07,77.47 ; 65.176,144.221 67.412,141.986 101.879,141.986 103.759,143.866 103.759,166.014 102.083,167.691 67.208,167.691 65.176,165.659 65.176,144.221 ; 105.994,138.989 153.111,138.989 155.397,138.989 155.55,139.141 155.55,168.453 107.721,168.453 106.045,168.453 105.994,168.402 105.994,168.123 105.994,138.989 ; 106.35,106.248 106.35,135.382 106.35,135.661 106.401,135.712 108.077,135.712 155.905,135.712 155.905,106.401 155.753,106.248 153.467,106.248 106.35,106.248

## Other copper
Top Layer:
  text "90.449 (mm)" at 102.276,171.425 h1.52
  text "62.281 (mm)" at 162.103,129.492 h1.52 r90

## Dimensions
52.07,77.47 to 52.07,176.53 on Mechanical 1
52.07,77.47 to 176.53,77.47 on Mechanical 1